# Altium PCB switchcard_unpowered.PcbDoc
Units mm, origin at the board's own origin, x right, y up, seen from the top; angles counter-clockwise.
Board outline 152.4 x 101.6 mm, 2 copper layers (Top Layer, Bottom Layer); 5 components, 43 nets, 51 pads, 0 vias.
Unrouted connection lines stored in the file: 4.
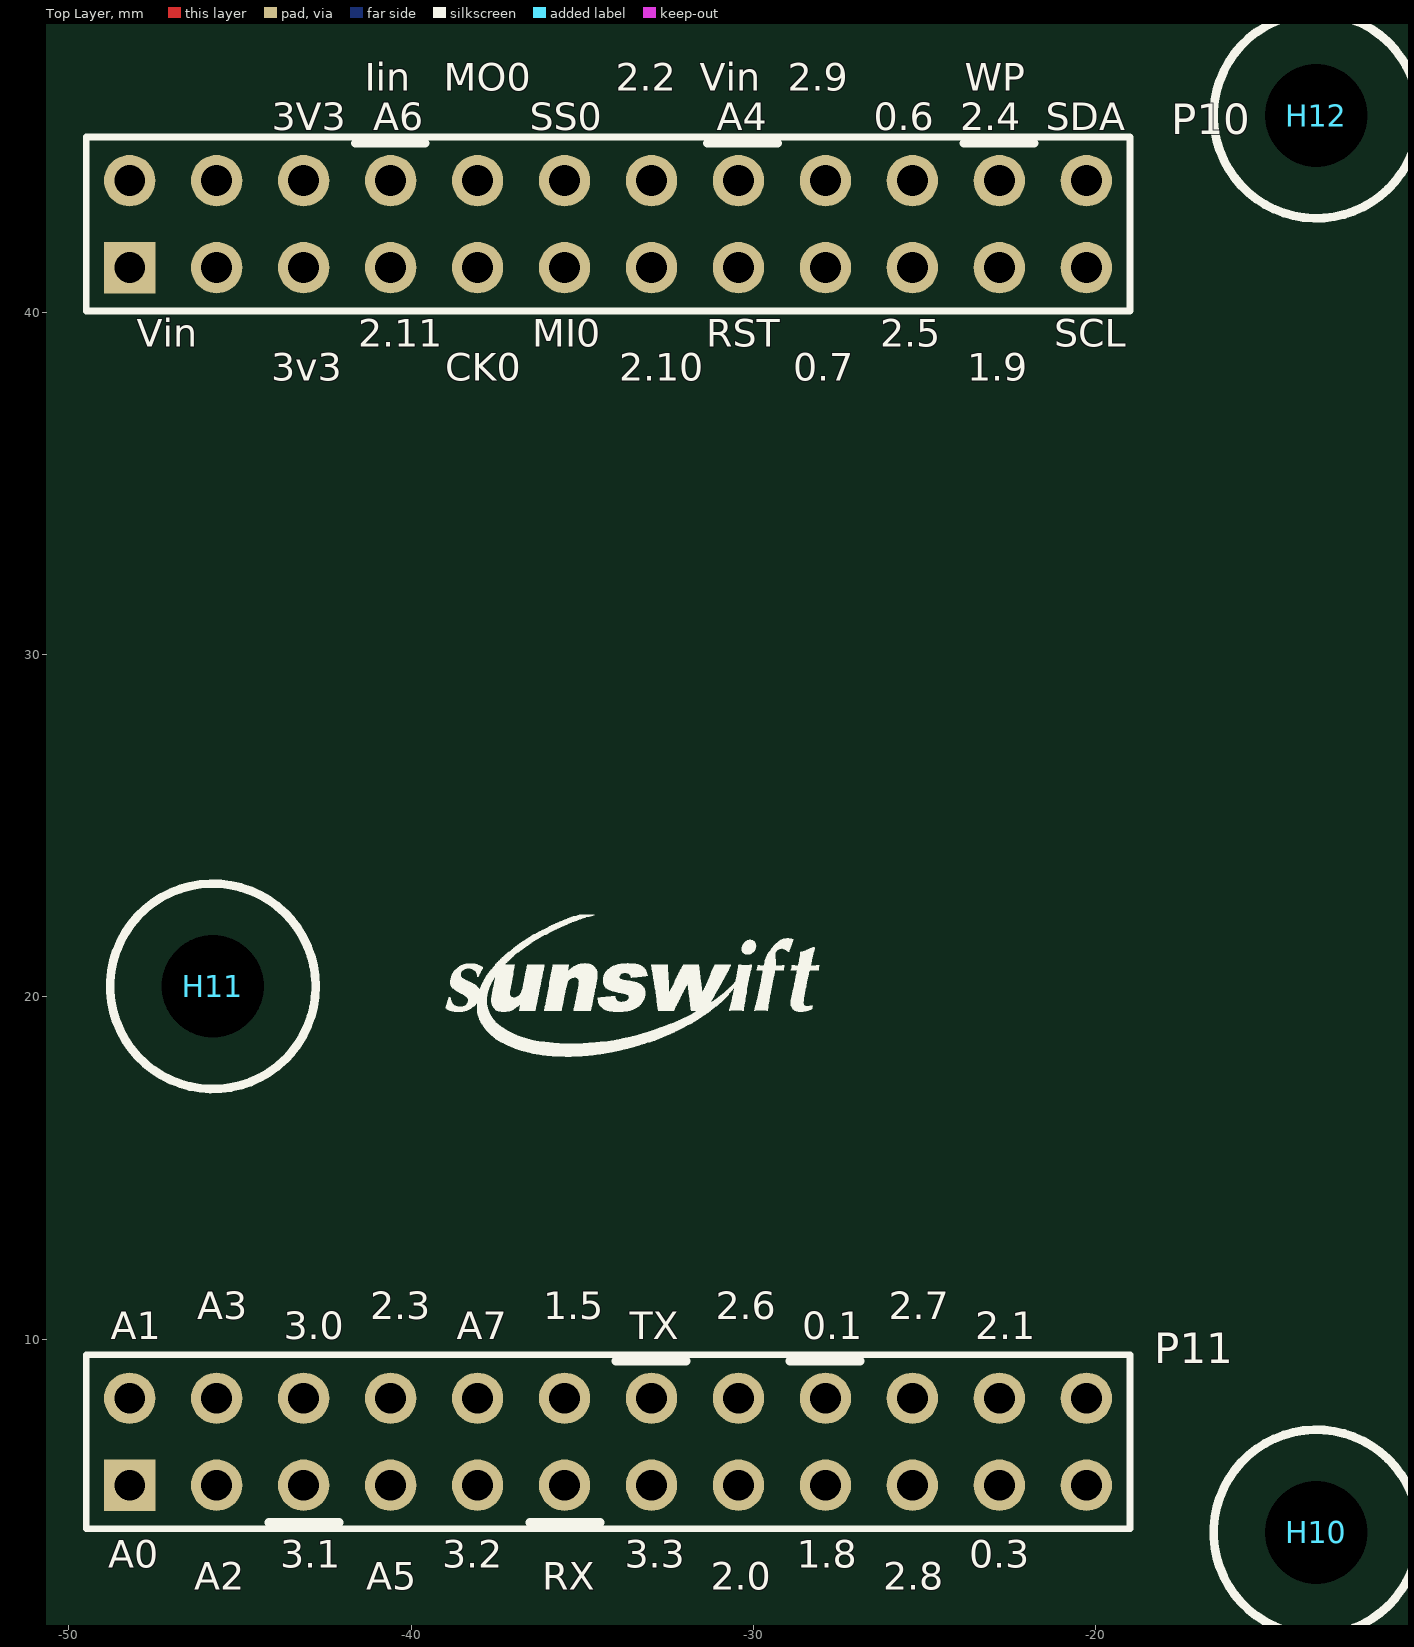
[diagram p0: Top Layer view]
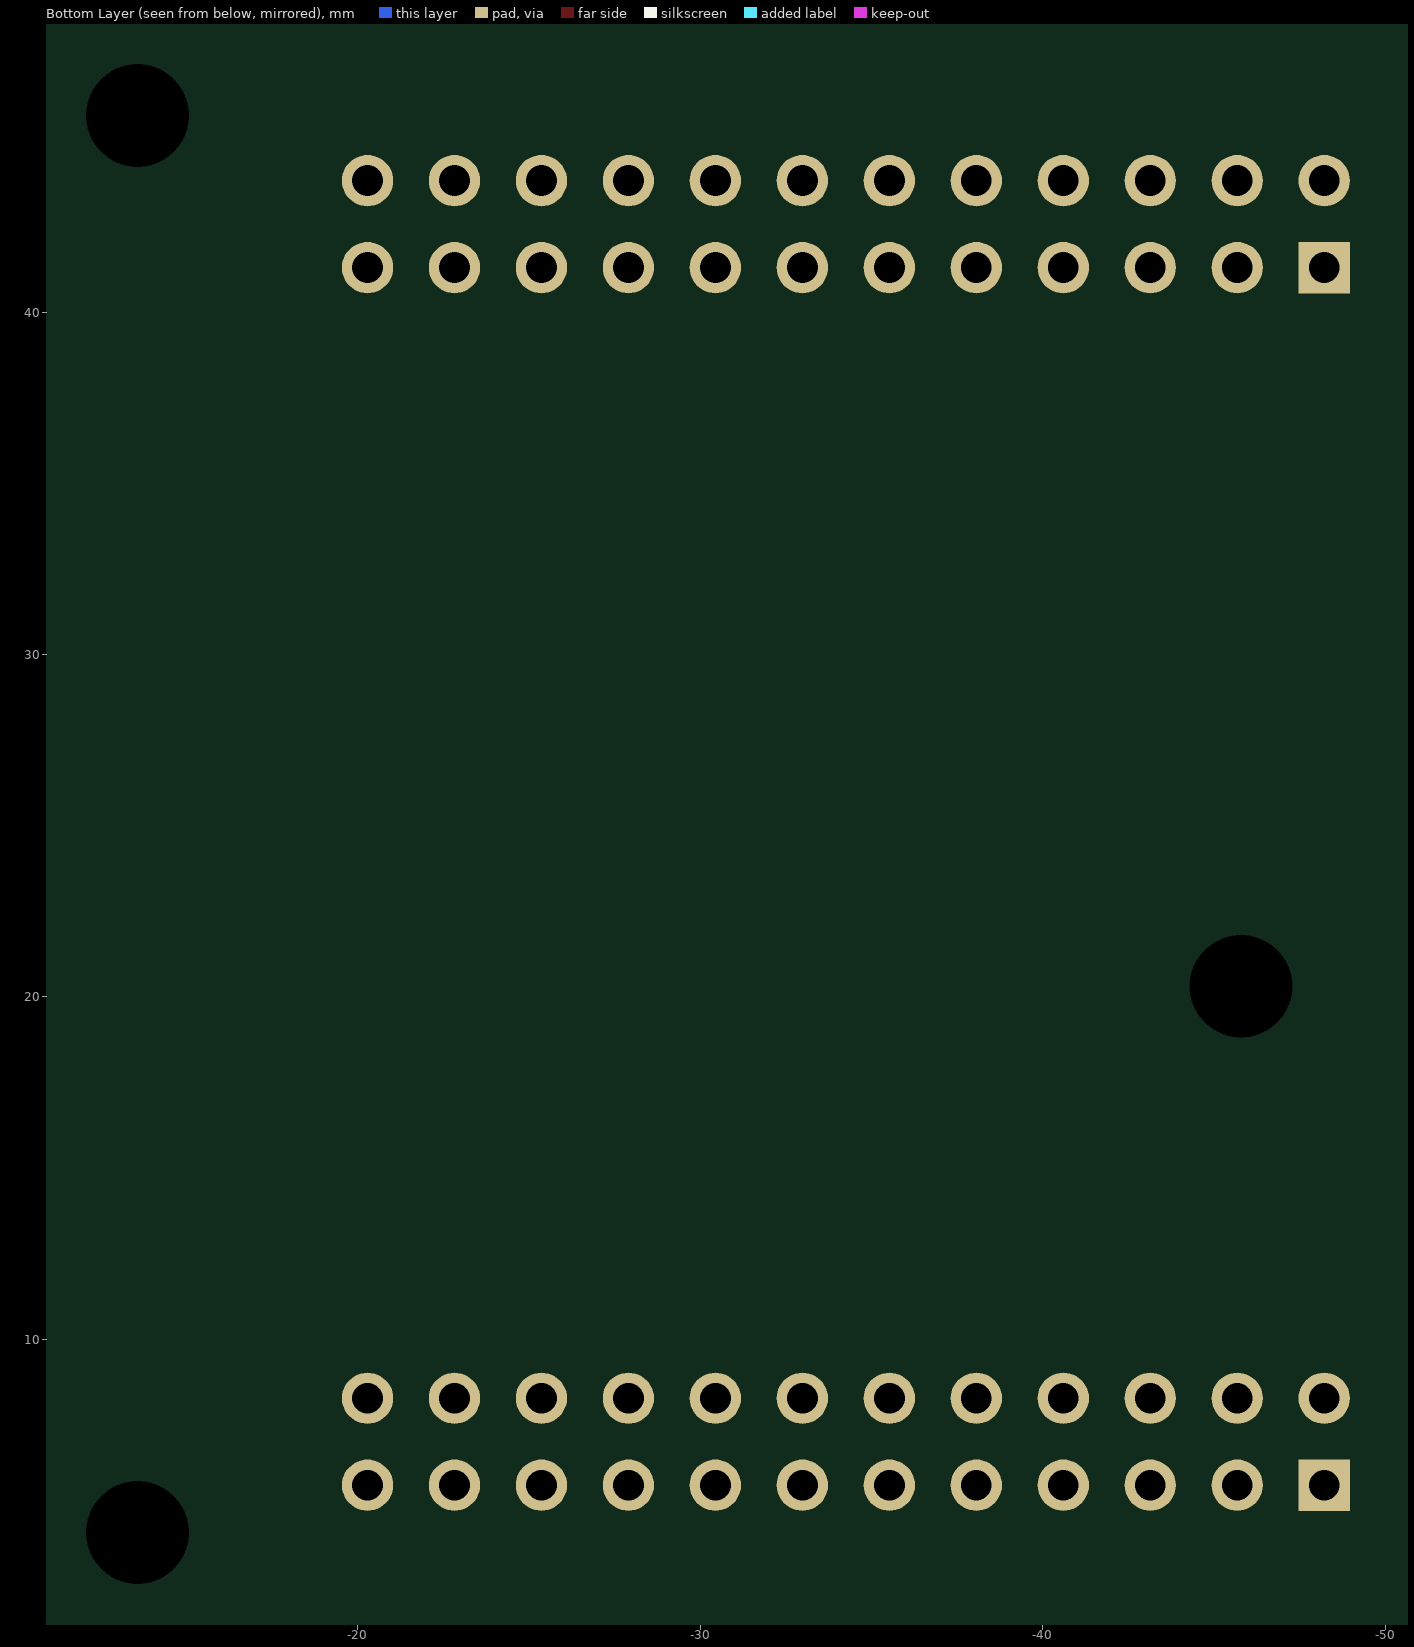
[diagram p1: Bottom Layer view, seen from below]

## Layer stack, top to bottom
Top Layer: signal copper 0.0356
Dielectric: dielectric 0.32, FR-4, Dk 4.8
Bottom Layer: signal copper 0.0356

## Board outline
-132.508,-7.888 19.892,-7.888 19.892,93.712 -132.508,93.712

## Design rules (kind name [scope] priority, off if disabled: settings)
Clearance [All] p1: gap=0.254
PolygonConnect [All] p1: connectstyle=Relief reliefconductorwidth=0.254 reliefentries=4 polygonreliefangle="90 Angle"
RoomDefinition TopLevel [InComponentClass('TopLevel')] p1: confinementstyle=ConfineIn formatcopy=TRUE lockcomponents=FALSE outline 21.092,9.012 76.192,9.012 76.192,27.312 21.092,27.312
RoutingVias [All] p1: holewidth=0.711 width=1.27 viastyle="Through Hole" minholewidth=0.3 minwidth=0.6 maxholewidth=0.711 maxwidth=1.27
SilkscreenOverComponentPads [All] p1: minsilkscreentomaskgap=0.254
SolderMaskExpansion [All] p1: expansion=0.102
Width [All] p1: maxlimit=2 minlimit=0.2 preferedwidth=0.3
27 further rules are at their usual default settings.

## Components (designator, comment, footprint, x,y, rotation, side; value= is the part's Value field where it differs from the comment)
H10 "HOLE" M2.5 -13.564,4.359 r0 top
H11 "HOLE" M2.5 -45.79,20.309 r0 top
H12 "HOLE" M2.5 -13.564,45.739 r0 top
P10 "Header 12X2A" HDR2X12_CEN -48.22,41.299 r0 top
P11 "Header 12X2A" HDR2X12_CEN -48.22,5.739 r0 top

## Footprints (in the part's own frame and the unit in brackets; to place one, negate y for a bottom-side part, rotate by r counter-clockwise, add the part's x,y. Pads: shape width x height; smd on the part's side, far side on the other; paste and mask are expansions set on the pad)
HDR2X12_CEN [mm] "Connector; Header; 12x2 Position"
  rect 1.5x1.5 hole 0.9: 1(0,0)
  round 1.5 hole 0.9: 2(2.54,0) 3(5.08,0) 4(7.62,0) 5(10.16,0) 6(12.7,0) 7(15.24,0) 8(17.78,0) 9(20.32,0) 10(22.86,0) 11(25.4,0) 12(27.94,0) 13(0,2.54) 14(2.54,2.54) 15(5.08,2.54) 16(7.62,2.54) 17(10.16,2.54) 18(12.7,2.54) 19(15.24,2.54) 20(17.78,2.54) 21(20.32,2.54) 22(22.86,2.54) 23(25.4,2.54) 24(27.94,2.54)
  silkscreen extent -1.27,-1.27 29.21,3.81
M2.5 [mm]
  round 0 hole 3: 1(0,0)
  silkscreen extent -3,-3 3,3

## Part data
H10 H11 H12: "Hole"
P10 P11: "Header, 12-Pin, Dual row"

## Nets (pads, with @x,y where several pads share a name; then routed paths per layer and width w, separated by ;. In a path a pad name is that pad's centre, name@x,y a point inside that pad or via, vN(x,y) a via of type N, cw(c..) or ccw(c..) an arc to the next point about the centre after c; other vN are vias at no path point)
3V3: P10.3 P10.15
EEPROM_WP: P10.23
GND: P10.13 P10.14 P11.12 P11.24
"PIO 0.1/CLKOUT": P11.21
"PIO 0.2/SSEL0": P10.18
"PIO 0.3": P11.11
"PIO 0.4/SCL": P10.12
"PIO 0.5/SDA": P10.24
"PIO 0.6": P10.22
"PIO 0.7": P10.9
"PIO 0.8/MISO0": P10.6
"PIO 0.9/MOSI0": P10.17
"PIO 0.10/SCK0": P10.5
"PIO 0.11/ADC0": P11.1
"PIO 1.0/ADC1": P11.13
"PIO 1.1/ADC2": P11.2
"PIO 1.2/ADC3": P11.14
"PIO 1.3/ADC4": P10.20
"PIO 1.4/ADC5/WAKEUP": P11.4
"PIO 1.5": P11.18
"PIO 1.6/RX": P11.6
"PIO 1.7/TX": P11.19
"PIO 1.8": P11.9
"PIO 1.9": P10.11
"PIO 1.10/ADC6": P10.16
"PIO 1.11/ADC7": P11.17
"PIO 2.0/SSEL1": P11.8
"PIO 2.1/SCK1": P11.23
"PIO 2.2/MISO1": P10.19
"PIO 2.3/MOSI1": P11.16
"PIO 2.5": P10.10
"PIO 2.6": P11.20
"PIO 2.7": P11.22
"PIO 2.8": P11.10
"PIO 2.9": P10.21
"PIO 2.10": P10.7
"PIO 2.11": P10.4
"PIO 3.0": P11.15
"PIO 3.1": P11.3
"PIO 3.2": P11.5
"PIO 3.3": P11.7
R\E\S\E\T\: P10.8
VIN: P10.1 P10.2
pads on no net: H10.1 H11.1 H12.1

## Silkscreen, mask and mechanical layers (free items; w line width, h text height)
Top Overlay:
  drawing of 1666 lines, arcs and shapes, not listed
  text "Iin" at -41.357,46.46 h0.81
  text "MO0" at -39.051,46.46 h0.81
  text "2.2" at -34.028,46.46 h0.81
  text "Vin" at -31.578,46.46 h0.81
  text "2.9" at -29.004,46.46 h0.81
  text "WP" at -23.831,46.46 h0.81
  text "3V3" at -44.075,45.317 h0.81
  text "A6" at -41.103,45.317 h0.81
  text "SS0" at -36.539,45.317 h0.81
  text "A4" at -31.07,45.317 h0.81
  text "0.6" at -26.492,45.317 h0.81
  text "2.4" at -23.958,45.317 h0.81
  text "SDA" at -21.469,45.317 h0.81
  text "Vin" at -48.012,38.992 h0.81
  text "2.11" at -41.539,38.992 h0.81
  text "MI0" at -36.458,38.992 h0.81
  text "RST" at -31.377,38.992 h0.81
  text "2.5" at -26.296,38.992 h0.81
  text "SCL" at -21.215,38.992 h0.81
  text "3v3" at -44.08,37.993 h0.81
  text "CK0" at -38.999,37.993 h0.81
  text "2.10" at -33.918,37.993 h0.81
  text "0.7" at -28.836,37.993 h0.81
  text "1.9" at -23.755,37.993 h0.81
  text "Switchcard" at -9.251,12.946 h1
  text "Simeon G" at -9.251,11.168 h1
  text "A3" at -46.245,10.584 h0.81
  text "2.3" at -41.196,10.584 h0.81
  text "1.5" at -36.147,10.584 h0.81
  text "2.6" at -31.097,10.584 h0.81
  text "2.7" at -26.048,10.584 h0.81
  text "A1" at -48.77,10.005 h0.81
  text "3.0" at -43.721,10.005 h0.81
  text "A7" at -38.671,10.005 h0.81
  text "TX" at -33.622,10.005 h0.81
  text "0.1" at -28.572,10.005 h0.81
  text "2.1" at -23.523,10.005 h0.81
  text "v0.1" at -9.251,9.39 h1
  text "A0" at -48.85,3.322 h0.81
  text "3.1" at -43.821,3.322 h0.81
  text "3.2" at -39.092,3.322 h0.81
  text "3.3" at -33.762,3.322 h0.81
  text "1.8" at -28.733,3.322 h0.81
  text "0.3" at -23.704,3.322 h0.81
  text "A2" at -46.335,2.687 h0.81
  text "A5" at -41.306,2.687 h0.81
  text "RX" at -36.177,2.687 h0.81
  text "2.0" at -31.248,2.687 h0.81
  text "2.8" at -26.219,2.687 h0.81
Mechanical 1:
  lines w0.2: -22.8,47.899 -50,47.899 -50,2.099 -22.5,2.099 cw(c-19.811,0.16) -16.5,0.005 ; -22.799,47.9 ccw(c-20.11,49.839) -16.799,49.994 ; -16.805,49.999 0,49.999 0,0 -16.505,0